# Altium PCB E-44 IPS TX.PcbDoc
Units mil, origin at the board's own origin, x right, y up, seen from the top; angles counter-clockwise.
Board outline 632.31 x 1303.31 mil, 2 copper layers (Top Layer, Bottom Layer); 7 components, 5 nets, 22 pads, 39 vias.
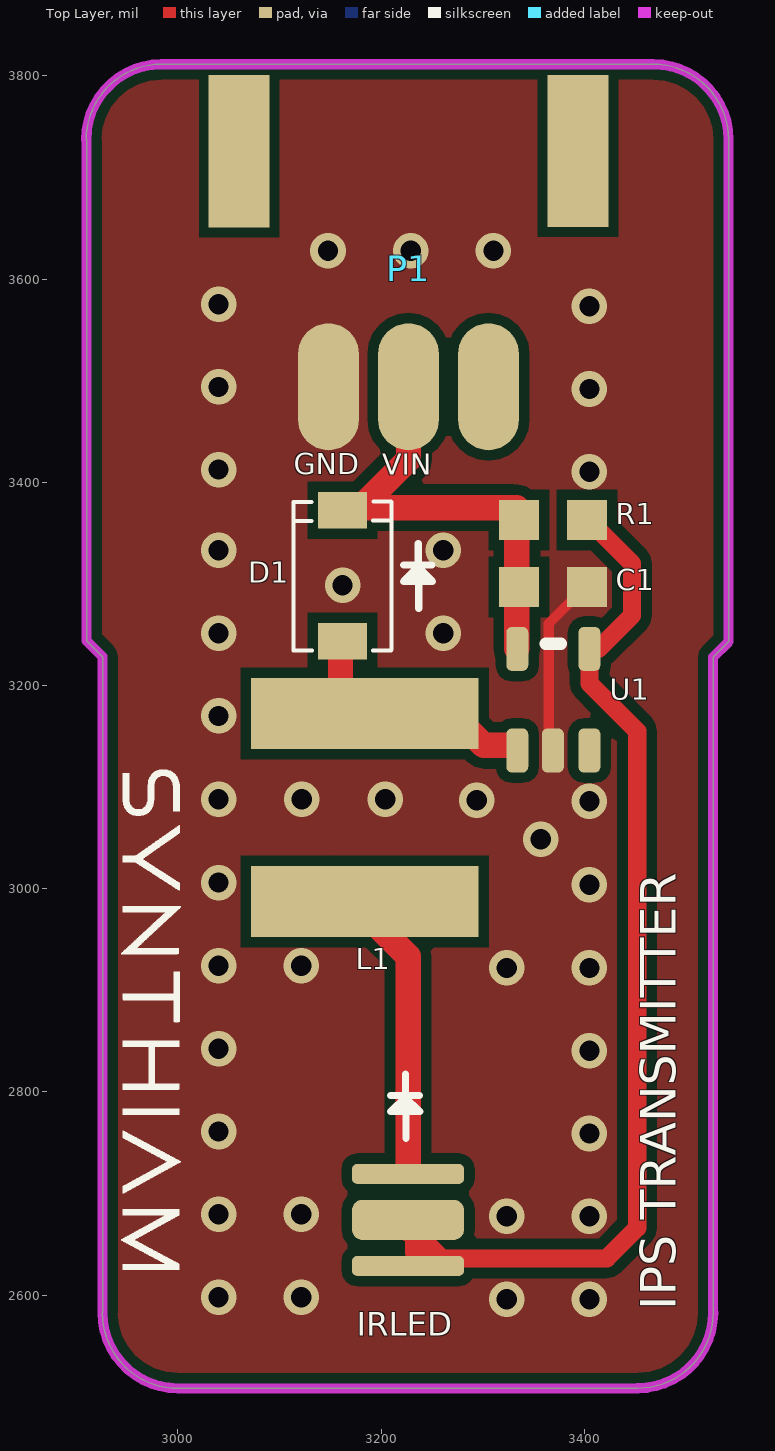
[diagram p0: Top Layer view]
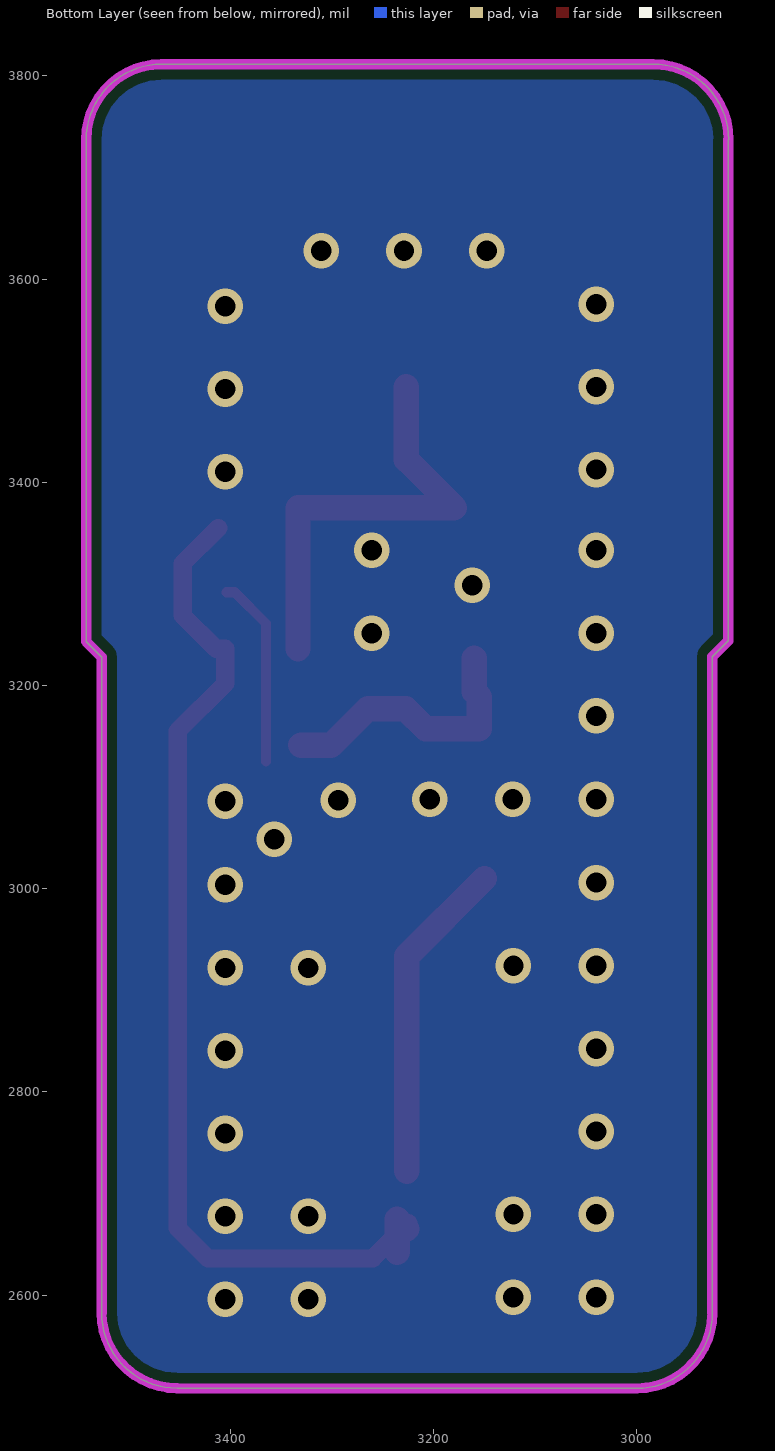
[diagram p1: Bottom Layer view, seen from below]

## Layer stack, top to bottom
Top Layer: signal copper 1.4
Dielectric: dielectric 12.6, FR-4, Dk 4.8
Bottom Layer: signal copper 1.4

## Board outline
2925.81,3228.19 2910,3244 2910,3737.19 2909.69,3737.19 cw(c2984,3737.19) 2984,3811.5 3467.69,3811.5 cw(c3467.69,3737.19) 3542,3737.19 3542,3243.12 3526.69,3227.8 3526.69,2582.62 3526.81,2582.62 cw(c3452.5,2582.62) 3452.5,2508.3 3452.5,2508.19 3000,2508.19 cw(c3000,2582.5) 2925.69,2582.5 2925.81,2582.5

## Design rules (kind name [scope] priority, off if disabled: settings)
Clearance [All] p1: gap=10
PolygonConnect PolygonConnect_3 [All vs IsNamedPolygon('BtmPoly')] p1: connectstyle=Direct reliefconductorwidth=10 reliefentries=4 polygonreliefangle="90 Angle"
PolygonConnect PolygonConnect_2 [All vs IsNamedPolygon('TopPoly')] p2: connectstyle=Direct reliefconductorwidth=10 reliefentries=4 polygonreliefangle="90 Angle"
PolygonConnect PolygonConnect_1 [All vs IsNamedPolygon('BtmPoly')] p3: connectstyle=Direct reliefconductorwidth=10 reliefentries=4 polygonreliefangle="90 Angle"
PolygonConnect [All] p4: connectstyle=Relief reliefconductorwidth=10 reliefentries=4 polygonreliefangle="90 Angle"
RoutingVias [All] p1: holewidth=28 width=35 viastyle="Through Hole" minholewidth=20 minwidth=35 maxholewidth=20 maxwidth=50
SilkscreenOverComponentPads [All] p1: minsilkscreentomaskgap=10
SolderMaskExpansion [All] p1: expansion=4
Width Width_3 [InNet('NetL1_2')] p1: maxlimit=25 minlimit=10 preferedwidth=25 minimp=50.000000 maximp=50.000000 favimp=50.000000
Width Width_2 [InNet('NetD1_1')] p2: maxlimit=25 minlimit=10 preferedwidth=25 minimp=50.000000 maximp=50.000000 favimp=50.000000
Width Width_1 [InNet('VIN')] p3: maxlimit=25 minlimit=10 preferedwidth=25 minimp=50.000000 maximp=50.000000 favimp=50.000000
Width [All] p4: maxlimit=25 minlimit=10 preferedwidth=10 minimp=50.000000 maximp=50.000000 favimp=50.000000
27 further rules are at their usual default settings.

## Components (designator, comment, footprint, x,y, rotation, side; value= is the part's Value field where it differs from the comment)
C1 "10uF" "0603 TIGHT" 3369,3297 r180 top
D1 "Schottky" "DIODE SOD-123" 3162,3308 r0 top
IRLED "IR LED" "IR LED" 3226.49,2674 r90 top (schematic designator LED)
L1 "Ferrite" "IND SMD LRG" 3184,3101 r270 top
P1 "Header 3" "JST-PH 3-pin SMD" 3227,3610 r0 top
R1 "Res1" "0603 tight" 3369,3363 r180 top
U1 "AL8860" "SOT-25 new" 3369,3193 r180 top

## Footprints (in the part's own frame and the unit in brackets; to place one, negate y for a bottom-side part, rotate by r counter-clockwise, add the part's x,y. Pads: shape width x height; smd on the part's side, far side on the other; paste and mask are expansions set on the pad)
"0603 TIGHT" [mm]
  rect 1x1 smd: 1(-0.85,0) 2(0.85,0)
"0603 tight" [mm]
  rect 1x1 smd: 1(-0.85,0) 2(0.85,0)
"DIODE SOD-123" [mm]
  rect 1.22x0.91 smd: 1(0,-1.635) 2(0,1.635)
  silkscreen extent -1.22,-1.87 1.23,1.86
"IND SMD LRG" [mil]
  rect 70x224 smd: 1(-71.5,0) 2(113.5,0)
"IR LED" [mm]
  rrect50% 0.5x2.8 smd: 1(-1.15,0) 2(1.15,0)
  rrect50% 1x2.8 smd: 1(0,0)
"JST-PH 3-pin SMD" [mil]
  rect 60x150 smd: 0(-166.71,115.62) 0(166.71,116.02)
  oval 60x125 smd: 1(-78.82,-116.02) 2(-0.08,-116.02) 3(78.66,-116.02)
"SOT-25 new" [mm]
  rrect50% 0.55x1.1 smd: 1(-0.914,-1.092) 2(0.889,-1.092) 3(0,1.448) 4(-0.914,1.448) 5(0.889,1.448)
  silkscreen extent -0.2,-1.22 0.18,-1.22

## Part data
C1: library part Cap, "Capacitor"
D1: library part "D Schottky", "Schottky Diode"
L1: library part Inductor, "Inductor"
P1: "Header, 3-Pin"
R1: "Resistor"

## Free pads (board coordinates)
  round 225 on Bottom Solder: 0(3221,2781)

## Via types
v1: diameter 35, hole 20, Top Layer to Bottom Layer, tented both sides, 39 vias

## Nets (pads, with @x,y where several pads share a name; then routed paths per layer and width w, separated by ;. In a path a pad name is that pad's centre, name@x,y a point inside that pad or via, vN(x,y) a via of type N, cw(c..) or ccw(c..) an arc to the next point about the centre after c; other vN are vias at no path point)
GND: C1.1 P1.1 U1.3 | length 187.5
  Top Layer w10: U1.3@3365,3125 3365,3261 3395.73,3291.73 C1.1@3403.73,3291.73
  other v1: 3323.5,2596 3405,2596 3040,2598 3121.5,2598 3323.5,2677.5 3405,2677.5 3040,2679.5 3121.5,2679.5 3405,2759 3040,2761 3405,2840.5 3040,2842.5 3323.5,2922 3405,2922 3040,2924 3121.5,2924 3405,3004 3040,3006 3357,3048.5 3405,3086 3294,3087 3040,3088 3122,3088 3204,3088 3040,3170 3261,3251.5 3040,3251.5 3162,3298.5 3040,3333 3261,3333 3405,3410.5 3040,3412.5 3405,3491.8 3040,3493.8 3405,3573.3 3040,3575.3 3147.7,3628 3229.2,3628 3310.5,3628
NetD1_1: D1.1 L1.1 U1.5 | length 270.2
  Top Layer w25: D1.1@3160,3226.63 3160,3194 3155,3189 3155,3157.5 3208,3157.5 3227.5,3177 3265,3177 3301,3141 U1.5@3331,3141
NetL1_2: IRLED.2 L1.2 | length 319.7
  Top Layer w25: L1.2@3150,3010 3226.49,2933.51 IRLED.2@3226.49,2722
NetLED_1: IRLED.1 R1.1 U1.1 | length 1045.5
  Top Layer w18: IRLED.1@3225,2671 3260,2636 3422,2636 3452,2666 3452,3155 3405,3202 U1.1 3414,3236 3447,3269 3447,3320 R1.1@3412,3355
  Top Layer w25: IRLED.1@3226.49,2665 3236,2674.51 3236,2642
VIN: C1.2 D1.2 P1.2 R1.2 U1.2 | length 428.5
  Top Layer w25: P1.2 3226.92,3422.29 3179.63,3375 R1.2@3330.54,3375 ; U1.2@3333.54,3236 R1.2@3333.54,3375
pads on no net: P1.0 P1.3 U1.4

## Polygon pours and split planes (outlines as drawn)
GND on Bottom Layer "BtmPoly" (solid, pour order 3): 2925.81,3127.5 2910,3143.31 2910,3597.19 2913.23,3739.45 cw(c2987.55,3739.45) 2987.55,3813.77 3466.45,3810.77 cw(c3466.45,3736.45) 3540.77,3736.45 3542,3143.31 3526.19,3127.5 3518,3126 3526.19,2582.31 3526.31,2582.31 cw(c3452,2582.31) 3452,2508 3452,2508.19 3000.31,2508.19 cw(c3000.31,2582.5) 2926,2582.5 2925.81,2582.5
GND on Top Layer "TopPoly" (solid, pour order 7): 2925.81,3127.5 2910,3143.31 2910,3598.19 2913.23,3737.45 cw(c2987.55,3737.45) 2987.55,3811.77 3462.45,3809.77 cw(c3462.45,3735.45) 3536.77,3735.45 3542,3143.31 3526.19,3127.5 3526.19,2583.31 3526.31,2583.31 cw(c3452,2583.31) 3452,2509 3452,2509.19 3000.31,2509.19 cw(c3000.31,2583.5) 2926,2583.5 2925.81,2583.5

## Keep-outs
Keep-Out Layer:
  lines w10: 2909.69,3737.19 cw(c2984,3737.19) 2984,3811.5 3467.69,3811.5 cw(c3467.69,3737.19) 3542,3737.19 3542,3243.12 3526.69,3227.8 3526.69,2582.62 ; 2910,3737.19 2910,3244 2925.81,3228.19 2925.81,2582.5 ; 2925.69,2582.5 ccw(c3000,2582.5) 3000,2508.19 3452.5,2508.19 ; 3452.5,2508.3 ccw(c3452.5,2582.62) 3526.81,2582.62

## Silkscreen, mask and mechanical layers (free items; w line width, h text height)
Top Overlay:
  drawing of 2276 lines, arcs and shapes, not listed
  text "GND" at 3114,3401 h35
  text "VIN" at 3201,3400.58 h35
  text "IPS TRANSMITTER" at 3502,2585 h60 r90
Bottom Solder:
  rectangle: 3010,2970 3428,3606
  text ":)" at 3194.52,3756 h150 r270